# EAGLE board HOMADOS (EAGLE 7.7.0)
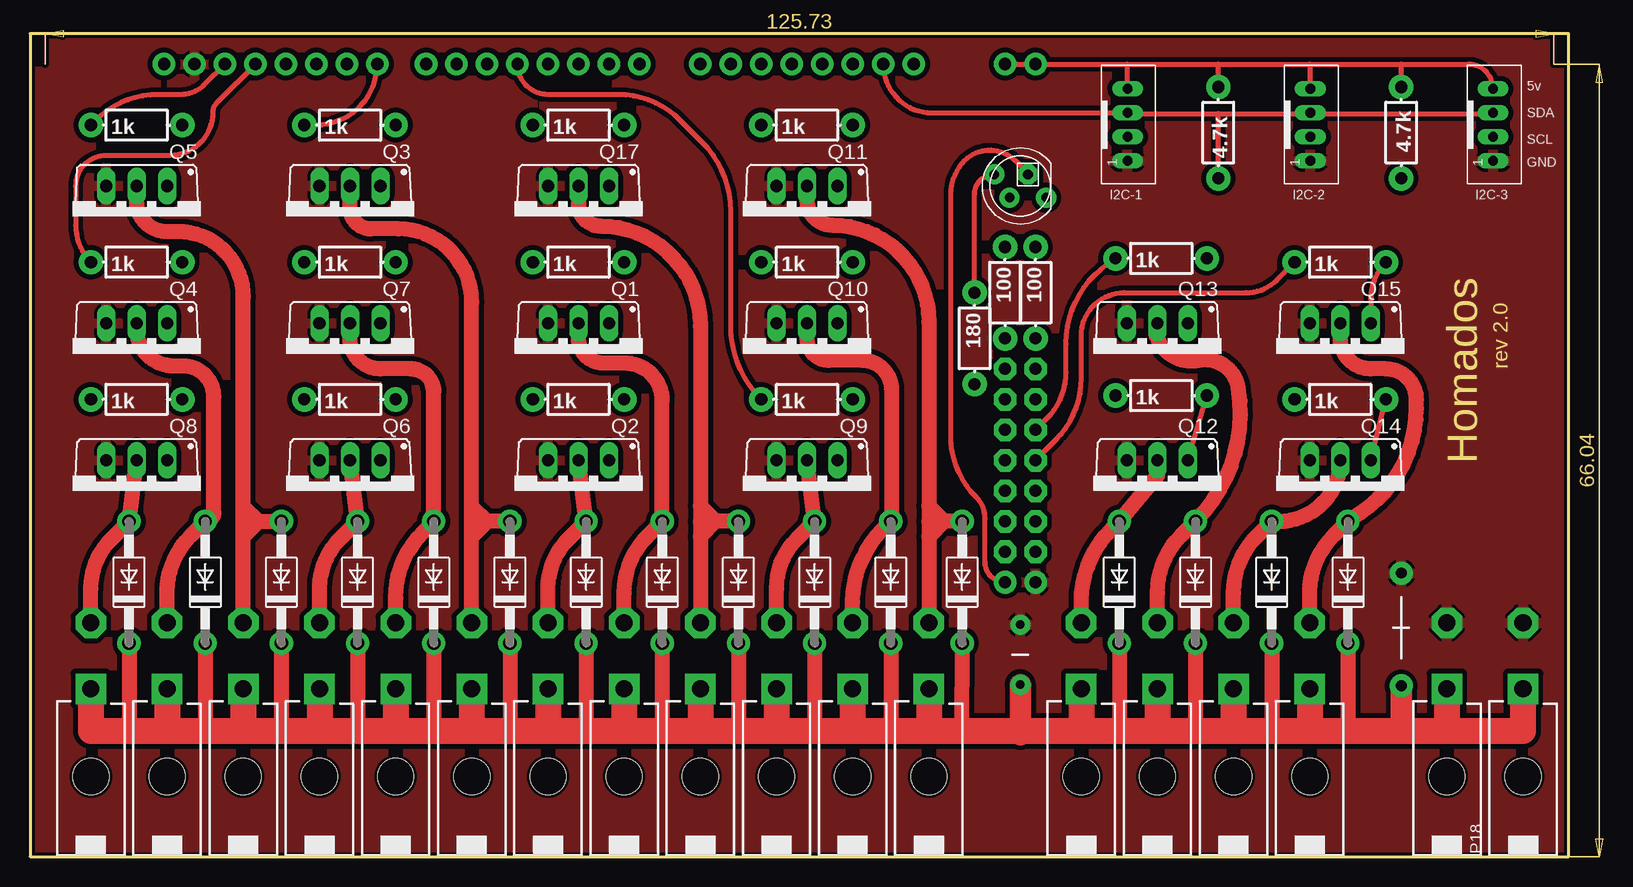
[diagram p0: board, top side]
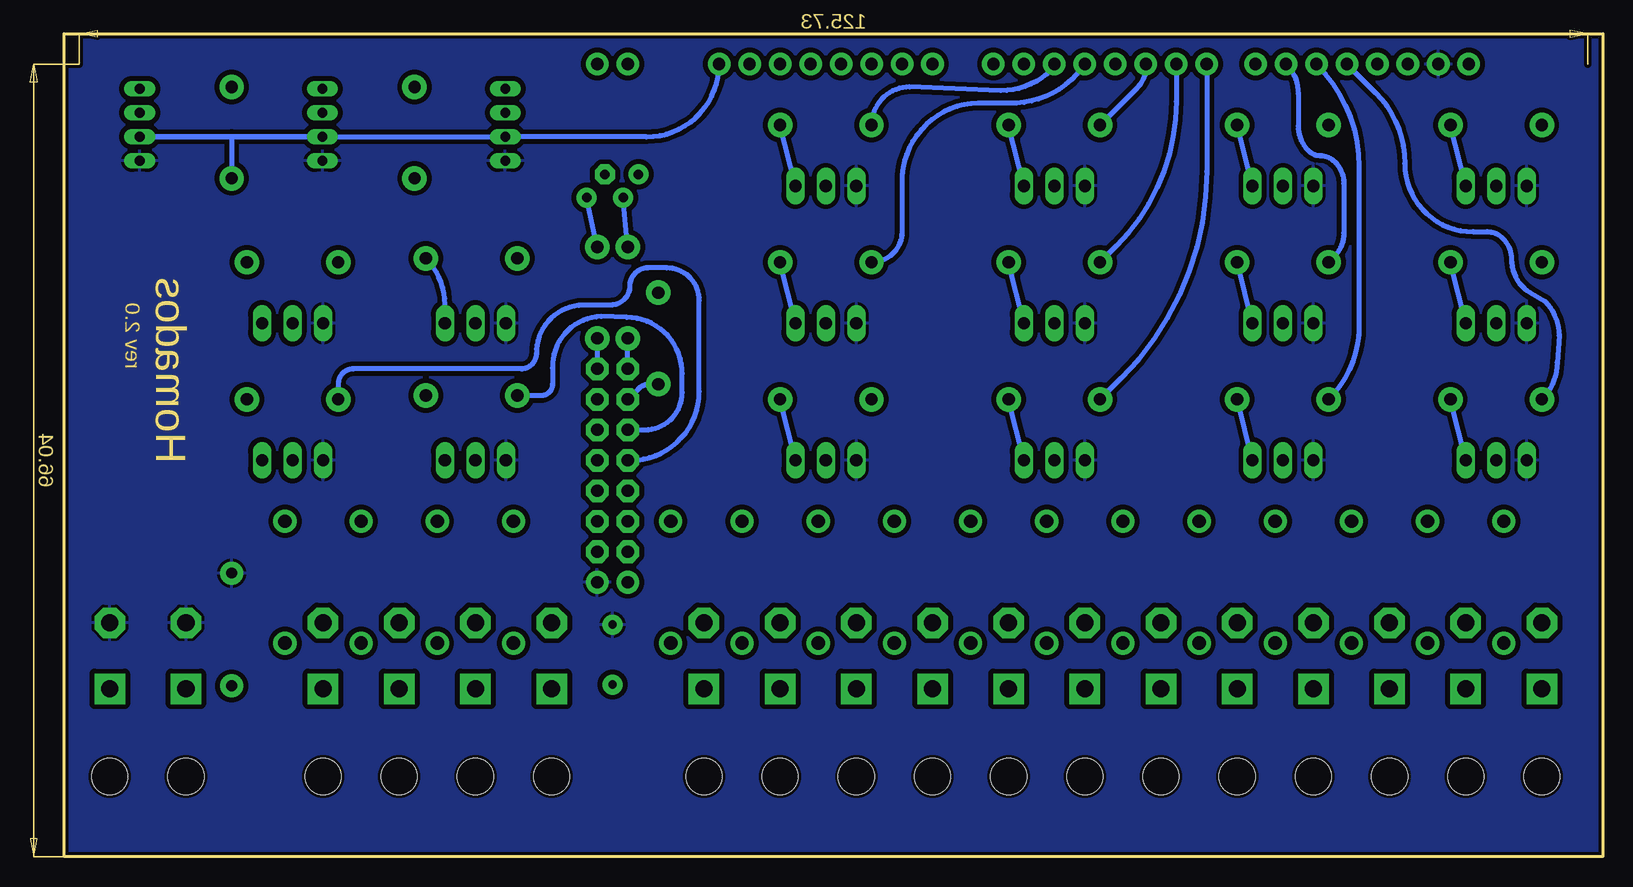
[diagram p1: board, bottom side, seen from below]

Size 128.27 x 68.58 mm. Coordinates in mm from the lower left corner, seen from the top.
Outline: 0,0 128.27,0 128.27,68.58 0,68.58 0,0
Copper layers (1*16): Top 0.035mm / dielectric 1.5mm / Bottom 0.035mm
Design rules "SeeedStudio_2layer_DRU_no_angle_20140221-1": minimum track width 6mil, minimum drill 12mil, track to track 6mil, track to pad 6mil, pad to pad 6mil, via to via 6mil, smd to smd 0mil, copper to edge 10mil, drill to drill 10mil, minimum pad ring 10mil, minimum via ring 6mil, stop-mask expansion 2mil, vias tented up to drill 100mil, thermal gap 10mil
Net classes: 0 default: width 0.406 mm, drill 0.762 mm, clearance 0.406 mm; 1 PWR: width 1.016 mm, drill 0.762 mm, clearance 0.508 mm; 2 GND: width 1.016 mm, drill 0.762 mm, clearance 1.016 mm

## Footprints (pad centres in the part's own frame; a part is rotated, then mirrored left to right if it is on the bottom)
CAP-PTH-5MM = drill 0.7 pad 1.651: 1 -2.5,0; 2 2.5,0
CAP-PTH-LARGE = drill 0.9 pad 1.905: 1 -4.826,0; 2 4.572,0
DO41-10 = drill 1.118 pad 1.93: A 5.08,0; C -5.08,0
JST_B4B-PH_HEADER = drill 0.8 long: P1 2.98,0.048; P2 0.98,0.048; P3 -1.02,0.048; P4 -3.02,0.048
39-30-?02? = drill 1.422 pad 2.54 square: 1 0,0 | drill 1.422 pad 2.54 octagon: 2 0,5.512 | hole 3: 0,-7.3
TO220BV = drill 1.016 long: D 0,-2.54; G -2.54,-2.54; S 2.54,-2.54
AXIAL-0.3-KIT = drill 1.016 pad 2.032: P$1 -3.81,0; P$2 3.81,0
ARDUINO_MEGA-PRO-5V = drill 1.016 pad 1.88: 0 -31.75,3.81; 1 -34.29,3.81; 2 -36.83,3.81; 3 -39.37,3.81; 4 -41.91,3.81; 5 -44.45,3.81; 5V@1 -1.27,3.81; 5V@2 1.27,3.81; 6 -46.99,3.81; 7 -49.53,3.81; 8 -53.594,3.81; 9 -56.134,3.81; 10 -58.674,3.81; 11 -61.214,3.81; 12 -63.754,3.81; 13 -66.294,3.81; 14 -26.67,3.81; 15 -24.13,3.81; 16 -21.59,3.81; 17 -19.05,3.81; 18 -16.51,3.81; 19 -13.97,3.81; 20 -11.43,3.81; 21 -8.89,3.81; AREF -71.374,3.81; GND@2 -1.27,-39.37; GND@3 1.27,-39.37; GND@4 -68.834,3.81 | drill 1.016 pad 1.88 octagon: 22 -1.27,-21.59; 23 1.27,-21.59; 42 -1.27,-24.13; 43 1.27,-24.13; 44 -1.27,-26.67; 45 1.27,-26.67; 46 -1.27,-29.21; 47 1.27,-29.21; 48 -1.27,-31.75; 49 1.27,-31.75; 50 -1.27,-34.29; 51 1.27,-34.29; 52 -1.27,-36.83; 53 1.27,-36.83
LED5MMRGB = drill 0.8 pad 1.676: 1 -2.159,0.968; 3 0.889,0.968; 4 2.159,-0.968 | drill 0.8 pad 1.676 octagon: 2 -0.635,-0.968

## Placement (x,y rotation side)
C1  [CAP-PTH-5MM]  82.55,16.83 90 top
C2  [CAP-PTH-LARGE]  114.3,19.05 90 top
D1  1N4004  [DO41-10]  52.7,22.86 90 top
D2  1N4004  [DO41-10]  59.05,22.86 90 top
D3  1N4004  [DO41-10]  46.35,22.86 90 top
D4  1N4004  [DO41-10]  40.01,22.86 90 top
D5  1N4004  [DO41-10]  33.66,22.86 90 top
D6  1N4004  [DO41-10]  27.3,22.86 90 top
D7  1N4004  [DO41-10]  20.95,22.86 90 top
D8  1N4004  [DO41-10]  14.61,22.86 90 top
D9  1N4004  [DO41-10]  8.26,22.86 90 top
D10  1N4004  [DO41-10]  65.41,22.86 90 top
D11  1N4004  [DO41-10]  71.75,22.86 90 top
D12  1N4004  [DO41-10]  77.71,22.86 90 top
D13  1N4004  [DO41-10]  109.86,22.86 90 top
D14  1N4004  [DO41-10]  103.5,22.86 90 top
D15  1N4004  [DO41-10]  97.16,22.86 90 top
D16  1N4004  [DO41-10]  90.81,22.86 90 top
I2C-1  JST-PH_4-PIN_HEADER  [JST_B4B-PH_HEADER]  91.44,60.96 270 top
I2C-2  JST-PH_4-PIN_HEADER  [JST_B4B-PH_HEADER]  106.68,60.96 270 top
I2C-3  JST-PH_4-PIN_HEADER  [JST_B4B-PH_HEADER]  121.92,60.96 270 top
P1  39-30-02?  [39-30-?02?]  49.53,13.97 0 top
P3  39-30-02?  [39-30-?02?]  55.88,13.97 0 top
P4  39-30-02?  [39-30-?02?]  43.18,13.97 0 top
P5  39-30-02?  [39-30-?02?]  36.83,13.97 0 top
P6  39-30-02?  [39-30-?02?]  30.48,13.97 0 top
P7  39-30-02?  [39-30-?02?]  24.13,13.97 0 top
P8  39-30-02?  [39-30-?02?]  17.78,13.97 0 top
P9  39-30-02?  [39-30-?02?]  11.43,13.97 0 top
P10  39-30-02?  [39-30-?02?]  5.08,13.97 0 top
P11  39-30-02?  [39-30-?02?]  62.23,13.97 0 top
P12  39-30-02?  [39-30-?02?]  68.58,13.97 0 top
P13  39-30-02?  [39-30-?02?]  74.93,13.97 0 top
P14  39-30-02?  [39-30-?02?]  106.68,13.97 0 top
P15  39-30-02?  [39-30-?02?]  100.33,13.97 0 top
P16  39-30-02?  [39-30-?02?]  93.98,13.97 0 top
P17  39-30-02?  [39-30-?02?]  87.63,13.97 0 top
P18  39-30-02?  [39-30-?02?]  124.46,13.97 0 top
P19  39-30-02?  [39-30-?02?]  118.11,13.97 0 top
Q1  [TO220BV]  45.72,41.91 180 top
Q2  [TO220BV]  45.72,30.48 180 top
Q3  [TO220BV]  26.67,53.34 180 top
Q4  [TO220BV]  8.89,41.91 180 top
Q5  [TO220BV]  8.89,53.34 180 top
Q6  [TO220BV]  26.67,30.48 180 top
Q7  [TO220BV]  26.67,41.91 180 top
Q8  [TO220BV]  8.89,30.48 180 top
Q9  [TO220BV]  64.77,30.48 180 top
Q10  [TO220BV]  64.77,41.91 180 top
Q11  [TO220BV]  64.77,53.34 180 top
Q12  [TO220BV]  93.98,30.48 180 top
Q13  [TO220BV]  93.98,41.91 180 top
Q14  [TO220BV]  109.22,30.48 180 top
Q15  [TO220BV]  109.22,41.91 180 top
Q17  [TO220BV]  45.72,53.34 180 top
R1  4.7k  [AXIAL-0.3-KIT]  99.06,60.33 90 top
R2  4.7k  [AXIAL-0.3-KIT]  114.3,60.33 270 top
R3  180  [AXIAL-0.3-KIT]  78.74,43.18 270 top
R4  1k  [AXIAL-0.3-KIT]  45.72,49.53 0 top
R5  1k  [AXIAL-0.3-KIT]  45.72,38.1 0 top
R6  1k  [AXIAL-0.3-KIT]  26.67,60.96 0 top
R7  1k  [AXIAL-0.3-KIT]  26.67,49.53 0 top
R8  1k  [AXIAL-0.3-KIT]  26.67,38.1 0 top
R9  1k  [AXIAL-0.3-KIT]  8.89,60.96 0 top
R10  1k  [AXIAL-0.3-KIT]  8.89,49.53 0 top
R11  1k  [AXIAL-0.3-KIT]  8.89,38.1 0 top
R12  1k  [AXIAL-0.3-KIT]  64.77,38.1 0 top
R13  1k  [AXIAL-0.3-KIT]  64.77,49.53 0 top
R14  1k  [AXIAL-0.3-KIT]  64.77,60.96 0 top
R15  1k  [AXIAL-0.3-KIT]  109.22,49.53 0 top
R16  1k  [AXIAL-0.3-KIT]  109.22,38.1 0 top
R17  1k  [AXIAL-0.3-KIT]  94.3,49.85 0 top
R18  1k  [AXIAL-0.3-KIT]  94.3,38.42 0 top
R19  1k  [AXIAL-0.3-KIT]  45.72,60.96 0 top
R20  100  [AXIAL-0.3-KIT]  83.82,46.99 270 top
R21  100  [AXIAL-0.3-KIT]  81.28,46.99 270 top
U2  ARDUINO-MEGAPRO-5V  [ARDUINO_MEGA-PRO-5V]  82.55,62.23 0 top
U$2  RGBLED_CA  [LED5MMRGB]  82.55,55.88 180 top

## Library data of the parts
C1 C2 R1-R21 = SparkFun-Passives
D1-D16 U$2 = adafruit
I2C-1-I2C-3 = JST_connectors
P1 P3-P19 = con-molex-mini-fit
Q1-Q15 Q17 = transistor-power
U2 = SparkFun-Minimal-Shields

## Nets
5V: I2C-1.P4 I2C-2.P4 I2C-3.P4 R1.P$2 R2.P$1 U2.5V@1 U2.5V@2
A0: R3.P$1 U$2.4
A2: R20.P$1 U$2.1
ARDUINO_GND: U2.GND@2 U$2.2
BLUE: R3.P$2 U2.42
D0: R15.P$1 U2.47
GND: C1.2 C2.2 I2C-1.P1 I2C-2.P1 I2C-3.P1 P18.2 P19.2 Q1.S Q2.S Q3.S Q4.S Q5.S Q6.S Q7.S Q8.S Q9.S Q10.S Q11.S Q12.S Q13.S Q14.S Q15.S Q17.S U2.GND@3 U2.GND@4
GREEN: R21.P$2 U2.22
N23: U2.51
N24: U2.52
N25: U2.53
N$1: R21.P$1 U$2.3
N$2: D2.A P3.2 Q17.D
N$3: U2.14
N$4: D5.A P6.2 Q7.D
N$5: D12.A P13.2 Q11.D
N$6: Q17.G R19.P$2
N$7: U2.15
N$8: U2.16
N$9: U2.17
N$10: Q1.G R4.P$2
N$11: D13.A P14.2 Q15.D
N$12: U2.18
N$13: U2.19
N$14: Q2.G R5.P$2
N$15: D1.A P1.2 Q1.D
N$16: D3.A P4.2 Q2.D
N$17: U2.43
N$18: Q3.G R6.P$2
N$19: D4.A P5.2 Q3.D
N$20: D6.A P7.2 Q6.D
N$21: D7.A P8.2 Q5.D
N$22: Q7.G R7.P$2
N$23: D11.A P12.2 Q10.D
N$24: D14.A P15.2 Q14.D
N$25: D15.A P16.2 Q13.D
N$26: Q6.G R8.P$2
N$27: D8.A P9.2 Q4.D
N$28: U2.48
N$29: U2.49
N$30: Q5.G R9.P$2
N$31: D16.A P17.2 Q12.D
N$32: U2.50
N$33: D10.A P11.2 Q9.D
N$34: Q4.G R10.P$2
N$35: D9.A P10.2 Q8.D
N$38: Q8.G R11.P$2
N$42: Q9.G R12.P$2
N$46: Q10.G R13.P$2
N$50: Q11.G R14.P$2
N$54: Q15.G R15.P$2
N$58: Q14.G R16.P$2
N$62: Q13.G R17.P$2
N$66: Q12.G R18.P$2
PW0: R14.P$1 U2.2
PW1: R13.P$1 U2.3
PW2: R12.P$1 U2.4
PW3: R19.P$1 U2.5
PW4: R4.P$1 U2.6
PW5: R5.P$1 U2.7
PW6: R6.P$1 U2.8
PW7: R7.P$1 U2.9
PW8: R8.P$1 U2.10
PW9: R11.P$1 U2.11
PW10: R10.P$1 U2.12
PW11: R9.P$1 U2.13
PW12: R18.P$1 U2.44
PW13: R17.P$1 U2.45
PW14: R16.P$1 U2.46
PWR: C1.1 C2.1 D1.C D2.C D3.C D4.C D5.C D6.C D7.C D8.C D9.C D10.C D11.C D12.C D13.C D14.C D15.C D16.C P1.1 P3.1 P4.1 P5.1 P6.1 P7.1 P8.1 P9.1 P10.1 P11.1 P12.1 P13.1 P14.1 P15.1 P16.1 P17.1 P18.1 P19.1
RED: R20.P$2 U2.23
SCL: I2C-1.P2 I2C-2.P2 I2C-3.P2 R2.P$2 U2.21
SDA: I2C-1.P3 I2C-2.P3 I2C-3.P3 R1.P$1 U2.20

## Tracks (layer width: path | path; a pad name or v marks a point on that pad's centre or on a via)
5V
  Top 0.406: U2.5V@1 U2.5V@2 91.44,66.04 | 91.44,66.04 99.06,66.04 | 99.06,66.04 106.68,66.04 | 106.68,66.04 114.3,66.04 | 114.3,66.04 119.91,66.04 arc-90 121.92,64.03 | R2.P$1 114.3,66.04 | I2C-2.P4 106.73,65.99 106.68,66.04 | R1.P$2 99.06,66.04 | I2C-1.P4 91.49,65.99 91.44,66.04
  Top 0.813: 121.92,64.03 I2C-3.P4
A0
  Top 0.406: R3.P$1 78.74,55.2 arc-90 U$2.4
A2
  Bottom 0.406: R20.P$1 U$2.1
ARDUINO_GND
  Top 0.406: U2.GND@2 arc-90 79.61,24.53 79.61,28.18 arc45 78.88,29.94 arc-45 76.76,35.08 76.76,55.17 arc-45 77.93,58.01 arc-90 82.09,58.01 83.19,56.91 U$2.2
BLUE
  Bottom 0.406: U2.42 80.38,39 arc45 79.48,39.37 R3.P$2
D0
  Top 0.406: U2.47 85.53,34.73 arc45 87.63,39.81 87.63,43.4 arc-90 91.22,46.99 101.38,46.99 arc45 103.92,48.04 R15.P$1
GND
  Bottom 0.813: U2.GND@4 13.72,65.47
  pour Top: 0,68.58 127.76,68.58 arc-90 128.27,68.07 128.27,0 0,-0.76
  pour Bottom: 0.32,68.26 128.27,68.58 128.27,0 0,0
GREEN
  Bottom 0.406: U2.22 R21.P$2
N$1
  Bottom 0.406: R21.P$1 U$2.3
N$2
  Top 1.27: Q17.D 45.72,54.37 arc90 47.55,52.55 arc-90 55.88,44.21 55.88,29.21 | 55.88,27.94 55.88,26.67 | 55.88,26.67 P3.2 | D2.A 57.15,27.94 | 57.15,27.94 55.88,27.94 | 57.15,27.94 55.88,29.21 | 55.88,29.21 55.88,27.94 | 55.88,26.67 57.15,27.94
N$4
  Top 1.27: P6.2 30.48,21.55 arc-45 32.75,27.04 D5.A 33.66,38.73 arc90 31.75,40.64 29.21,40.64 arc-90 26.67,43.18 Q7.D
N$5
  Top 1.27: Q11.D 64.77,54.69 arc90 66.83,52.63 arc-90 74.93,44.53 74.93,29.21 | 74.93,29.21 74.93,27.94 | 74.93,27.94 74.93,26.67 | 74.93,26.67 P13.2 | D12.A 76.2,27.94 | 76.2,27.94 74.93,27.94 | 76.2,27.94 74.93,29.21 | 76.2,27.94 74.93,26.67
N$6
  Bottom 0.406: Q17.G R19.P$2
N$10
  Bottom 0.406: Q1.G R4.P$2
N$11
  Top 1.27: P14.2 106.68,21.92 arc-45 108.69,26.78 D13.A 110.91,28.64 arc56 115.57,37.35 115.57,38.1 arc90 113.03,40.64 111.76,40.64 arc-90 109.22,43.18 Q15.D
N$14
  Bottom 0.406: Q2.G R5.P$2
N$15
  Top 1.27: P1.2 49.53,21.97 arc-45 51.51,26.74 D1.A 52.7,38.02 arc90 49.61,41.12 47.78,41.12 arc-90 45.72,43.18 Q1.D
N$16
  Top 1.27: P4.2 43.18,22.28 arc-45 44.94,26.52 D3.A Q2.D
N$18
  Bottom 0.406: Q3.G R6.P$2
N$19
  Top 1.27: P5.2 36.83,26.67 | 36.83,26.67 36.83,27.94 | 36.83,27.94 36.83,29.21 | 36.83,29.21 36.83,46.2 arc90 30.72,52.31 28.42,52.31 arc-90 26.67,54.05 Q3.D | D4.A 38.1,27.94 | 38.1,27.94 36.83,27.94 | 36.83,29.21 38.1,27.94 | 38.1,27.94 36.83,26.67
N$20
  Top 1.27: P7.2 24.13,22.28 arc-45 25.89,26.52 D6.A Q6.D
N$21
  Top 1.27: 17.78,27.94 17.78,29.21 | 17.78,29.21 17.78,46.68 arc90 12.39,52.07 11.43,52.07 arc-90 8.89,54.61 Q5.D | P8.2 17.78,26.67 | 17.78,26.67 17.78,27.94 | 17.78,27.94 19.05,27.94 | 19.05,27.94 D7.A | 17.78,29.21 19.05,27.94 | 17.78,26.67 19.05,27.94
N$22
  Bottom 0.406: Q7.G R7.P$2
N$23
  Top 1.27: P12.2 68.58,21.23 arc-45 71.08,27.27 D11.A arc90 71.83,28.02 71.83,38.89 arc90 69.37,41.35 66.6,41.35 arc-90 64.77,43.18 Q10.D
N$24
  Top 1.27: P15.2 100.33,21.97 arc-45 102.31,26.74 D14.A 104.14,27.94 arc90 Q14.D
N$25
  Top 1.27: P16.2 93.98,21.97 arc-45 95.96,26.74 D15.A arc54 100.73,39.05 arc92 97.39,41.35 arc-79 93.98,43.18 arc-45 Q13.D
N$26
  Bottom 0.406: Q6.G R8.P$2
N$27
  Top 1.27: P9.2 11.43,21.97 arc-45 13.41,26.74 D8.A arc90 15.32,28.65 15.32,38.34 arc90 12.78,40.88 11.99,40.88 arc-90 8.89,43.97 Q4.D
N$30
  Bottom 0.406: Q5.G R9.P$2
N$31
  Top 1.27: P17.2 87.63,21.19 arc-45 90.16,27.3 D16.A 93.98,31.75 Q12.D
N$33
  Top 1.27: P11.2 62.23,22.34 arc-45 63.95,26.48 D10.A Q9.D
N$34
  Bottom 0.406: Q4.G R10.P$2
N$35
  Top 1.27: Q8.D D9.A 6.79,26.48 arc45 5.08,22.34 P10.2
N$38
  Bottom 0.406: Q8.G R11.P$2
N$42
  Bottom 0.406: Q9.G R12.P$2
N$46
  Bottom 0.406: Q10.G R13.P$2
N$50
  Bottom 0.406: Q11.G R14.P$2
N$54
  Top 0.406: R15.P$2 arc45 111.76,46.46 Q15.G
N$58
  Top 0.406: Q14.G R16.P$2
N$62
  Bottom 0.406: Q13.G 96.52,46.02 arc-45 R17.P$2
N$66
  Top 0.406: Q12.G R18.P$2
PW0
  Bottom 0.406: U2.2 45.94,65.58 arc45 50.2,63.82 57.78,64.14 arc-90 R14.P$1
PW1
  Bottom 0.406: U2.3 43.87,65.19 arc45 48.87,62.79 52.07,62.79 arc-90 58.42,56.19 58.42,52.07 arc90 R13.P$1
PW2
  Top 0.406: R12.P$1 arc-45 58.42,44.23 58.42,53.78 arc45 56.04,59.53 54.24,61.33 arc45 49,63.5 43.18,63.5 arc-90 U2.4
PW3
  Bottom 0.406: U2.5 38.1,65.82 arc45 38.84,64.03 R19.P$1
PW4
  Bottom 0.406: U2.6 35.56,62.94 arc45 40.55,50.89 R4.P$1
PW5
  Bottom 0.406: U2.7 33.02,57.09 arc45 40.16,39.84 R5.P$1
PW6
  Top 0.406: U2.8 28.89,65.98 arc-90 23.88,60.96 R6.P$1
PW7
  Bottom 0.406: U2.9 arc45 25.4,63.59 25.4,60.87 arc-45 24.57,58.86 24.5,58.79 arc-45 23.6,58.42 arc45 22.33,57.89 arc45 21.59,56.1 21.59,51.98 arc45 22.42,49.97 R7.P$1
PW8
  Bottom 0.406: U2.10 U2.10 arc45 20.32,57.47 20.32,44.23 arc45 R8.P$1
PW9
  Bottom 0.406: U2.11 18.96,63.66 arc45 16.51,57.75 arc-90 10.83,52.07 9.63,52.07 arc45 8.36,51.54 arc45 7.62,49.75 arc-59 6.05,46.99 4.83,46.26 arc45 3.65,43.42 3.81,41.17 arc45 R11.P$1
PW10
  Top 0.406: U2.12 15.57,62.82 arc45 15.24,62.01 arc-90 11.65,58.42 6.35,58.42 arc90 3.81,55.88 3.81,52.6 arc45 R10.P$1
PW11
  Top 0.406: U2.13 14.52,64.3 arc-45 12.58,63.5 10.69,63.5 arc45 5.45,61.33 R9.P$1
PW12
  Bottom 0.406: U2.44 79.85,35.56 arc-90 76.76,38.66 76.76,40.24 arc-90 81.36,44.93 83.5,45.01 arc-90 87.55,40.72 87.55,39.37 arc90 88.5,38.42 R18.P$1
PW13
  Top 0.406: U2.45 84.78,36.52 arc45 86.36,40.33 86.36,42.73 arc-55 89.86,49.41 R17.P$1
PW14
  Bottom 0.406: U2.46 81.04,33.02 arc-90 75.33,38.73 75.33,46.35 arc-90 78.03,49.05 79.61,49.05 arc-90 81.12,47.55 arc90 82.71,45.96 85.01,45.96 arc-90 88.9,41.91 arc90 90.17,40.64 104.14,40.64 arc-90 105.41,39.37 R16.P$1
PWR
  Top 1.27: D9.C 8.26,10.48 | D8.C 14.61,10.48 | D7.C 20.95,10.48 | D6.C 27.3,10.48 | D5.C 33.66,10.48 | D4.C 40.01,10.48 | D3.C 46.35,10.48 | D1.C 52.7,10.48 | D2.C 59.05,10.48 | D10.C 65.41,10.48 | D11.C 71.75,10.48 | D16.C 90.81,10.48 | D15.C 97.16,10.48 | D13.C 109.86,10.48 | D12.C 77.63,10.48 | D14.C 103.5,10.48
  Top 1.778: C2.1 114.3,10.48 | C1.1 82.55,10.48 82.55,10.16
  Top 2.184: P10.1 5.08,10.48 8.26,10.48 11.43,10.48 | 11.43,10.48 14.61,10.48 17.78,10.48 | 17.78,10.48 20.95,10.48 24.13,10.48 | 24.13,10.48 27.3,10.48 30.48,10.48 | 30.48,10.48 33.66,10.48 36.83,10.48 | 36.83,10.48 40.01,10.48 43.18,10.48 | 43.18,10.48 46.35,10.48 49.53,10.48 | 49.53,10.48 52.7,10.48 55.88,10.48 | 55.88,10.48 59.05,10.48 62.23,10.48 | 62.23,10.48 65.41,10.48 68.58,10.48 | 68.58,10.48 71.75,10.48 74.93,10.48 | 74.93,10.48 77.63,10.48 82.55,10.48 87.63,10.48 | 87.63,10.48 90.81,10.48 93.98,10.48 | 93.98,10.48 97.16,10.48 100.33,10.48 | 100.33,10.48 103.5,10.48 106.68,10.48 | 106.68,10.48 109.86,10.48 114.3,10.48 118.11,10.48 | 118.11,10.48 124.46,10.48 P18.1 | P9.1 11.43,10.48 | P8.1 17.78,10.48 | P7.1 24.13,10.48 | P6.1 30.48,10.48 | P5.1 36.83,10.48 | P4.1 43.18,10.48 | P1.1 49.53,10.48 | P3.1 55.88,10.48 | P11.1 62.23,10.48 | P12.1 68.58,10.48 | P13.1 74.93,10.48 | P17.1 87.63,10.48 | P16.1 93.98,10.48 | P15.1 100.33,10.48 | P14.1 106.68,10.48 | P19.1 118.11,10.48
RED
  Bottom 0.406: R20.P$2 U2.23
SCL
  Bottom 0.406: R2.P$2 114.3,60.01 114.27,59.98 I2C-2.P2 | I2C-2.P2 I2C-3.P2 106.78,59.98 106.75,60.01 | I2C-2.P2 I2C-1.P2 79.72,59.98 arc-90 U2.21
  Bottom 0.813: I2C-2.P2 106.75,60.01
SDA
  Top 0.406: U2.20 arc90 75.18,61.98 I2C-1.P3 | 91.56,61.91 99.06,61.91 | 99.06,61.91 106.68,61.91 | 106.8,61.91 121.92,61.91 | R1.P$1 99.06,61.91
  Top 0.813: I2C-1.P3 91.56,61.91 | 106.68,61.91 106.11,61.98 I2C-2.P3 106.8,61.91 | 121.92,61.91 121.99,61.98 I2C-3.P3

## Text on the board
Dimension: Homados | rev 2.0
tNames: 5v | SDA | SCL | GND